# Altium PCB Main.PcbDoc (part 4 of 4)
Units mil, origin at the board's own origin, x right, y up, seen from the top; angles counter-clockwise.
Board outline 4000 x 4000 mil, 4 copper layers (L1-Top, L2-Ground, L3-Power, L4-Bottom), stack 63.556 mil thick; 424 components, 250 nets, 1628 pads, 3310 vias.
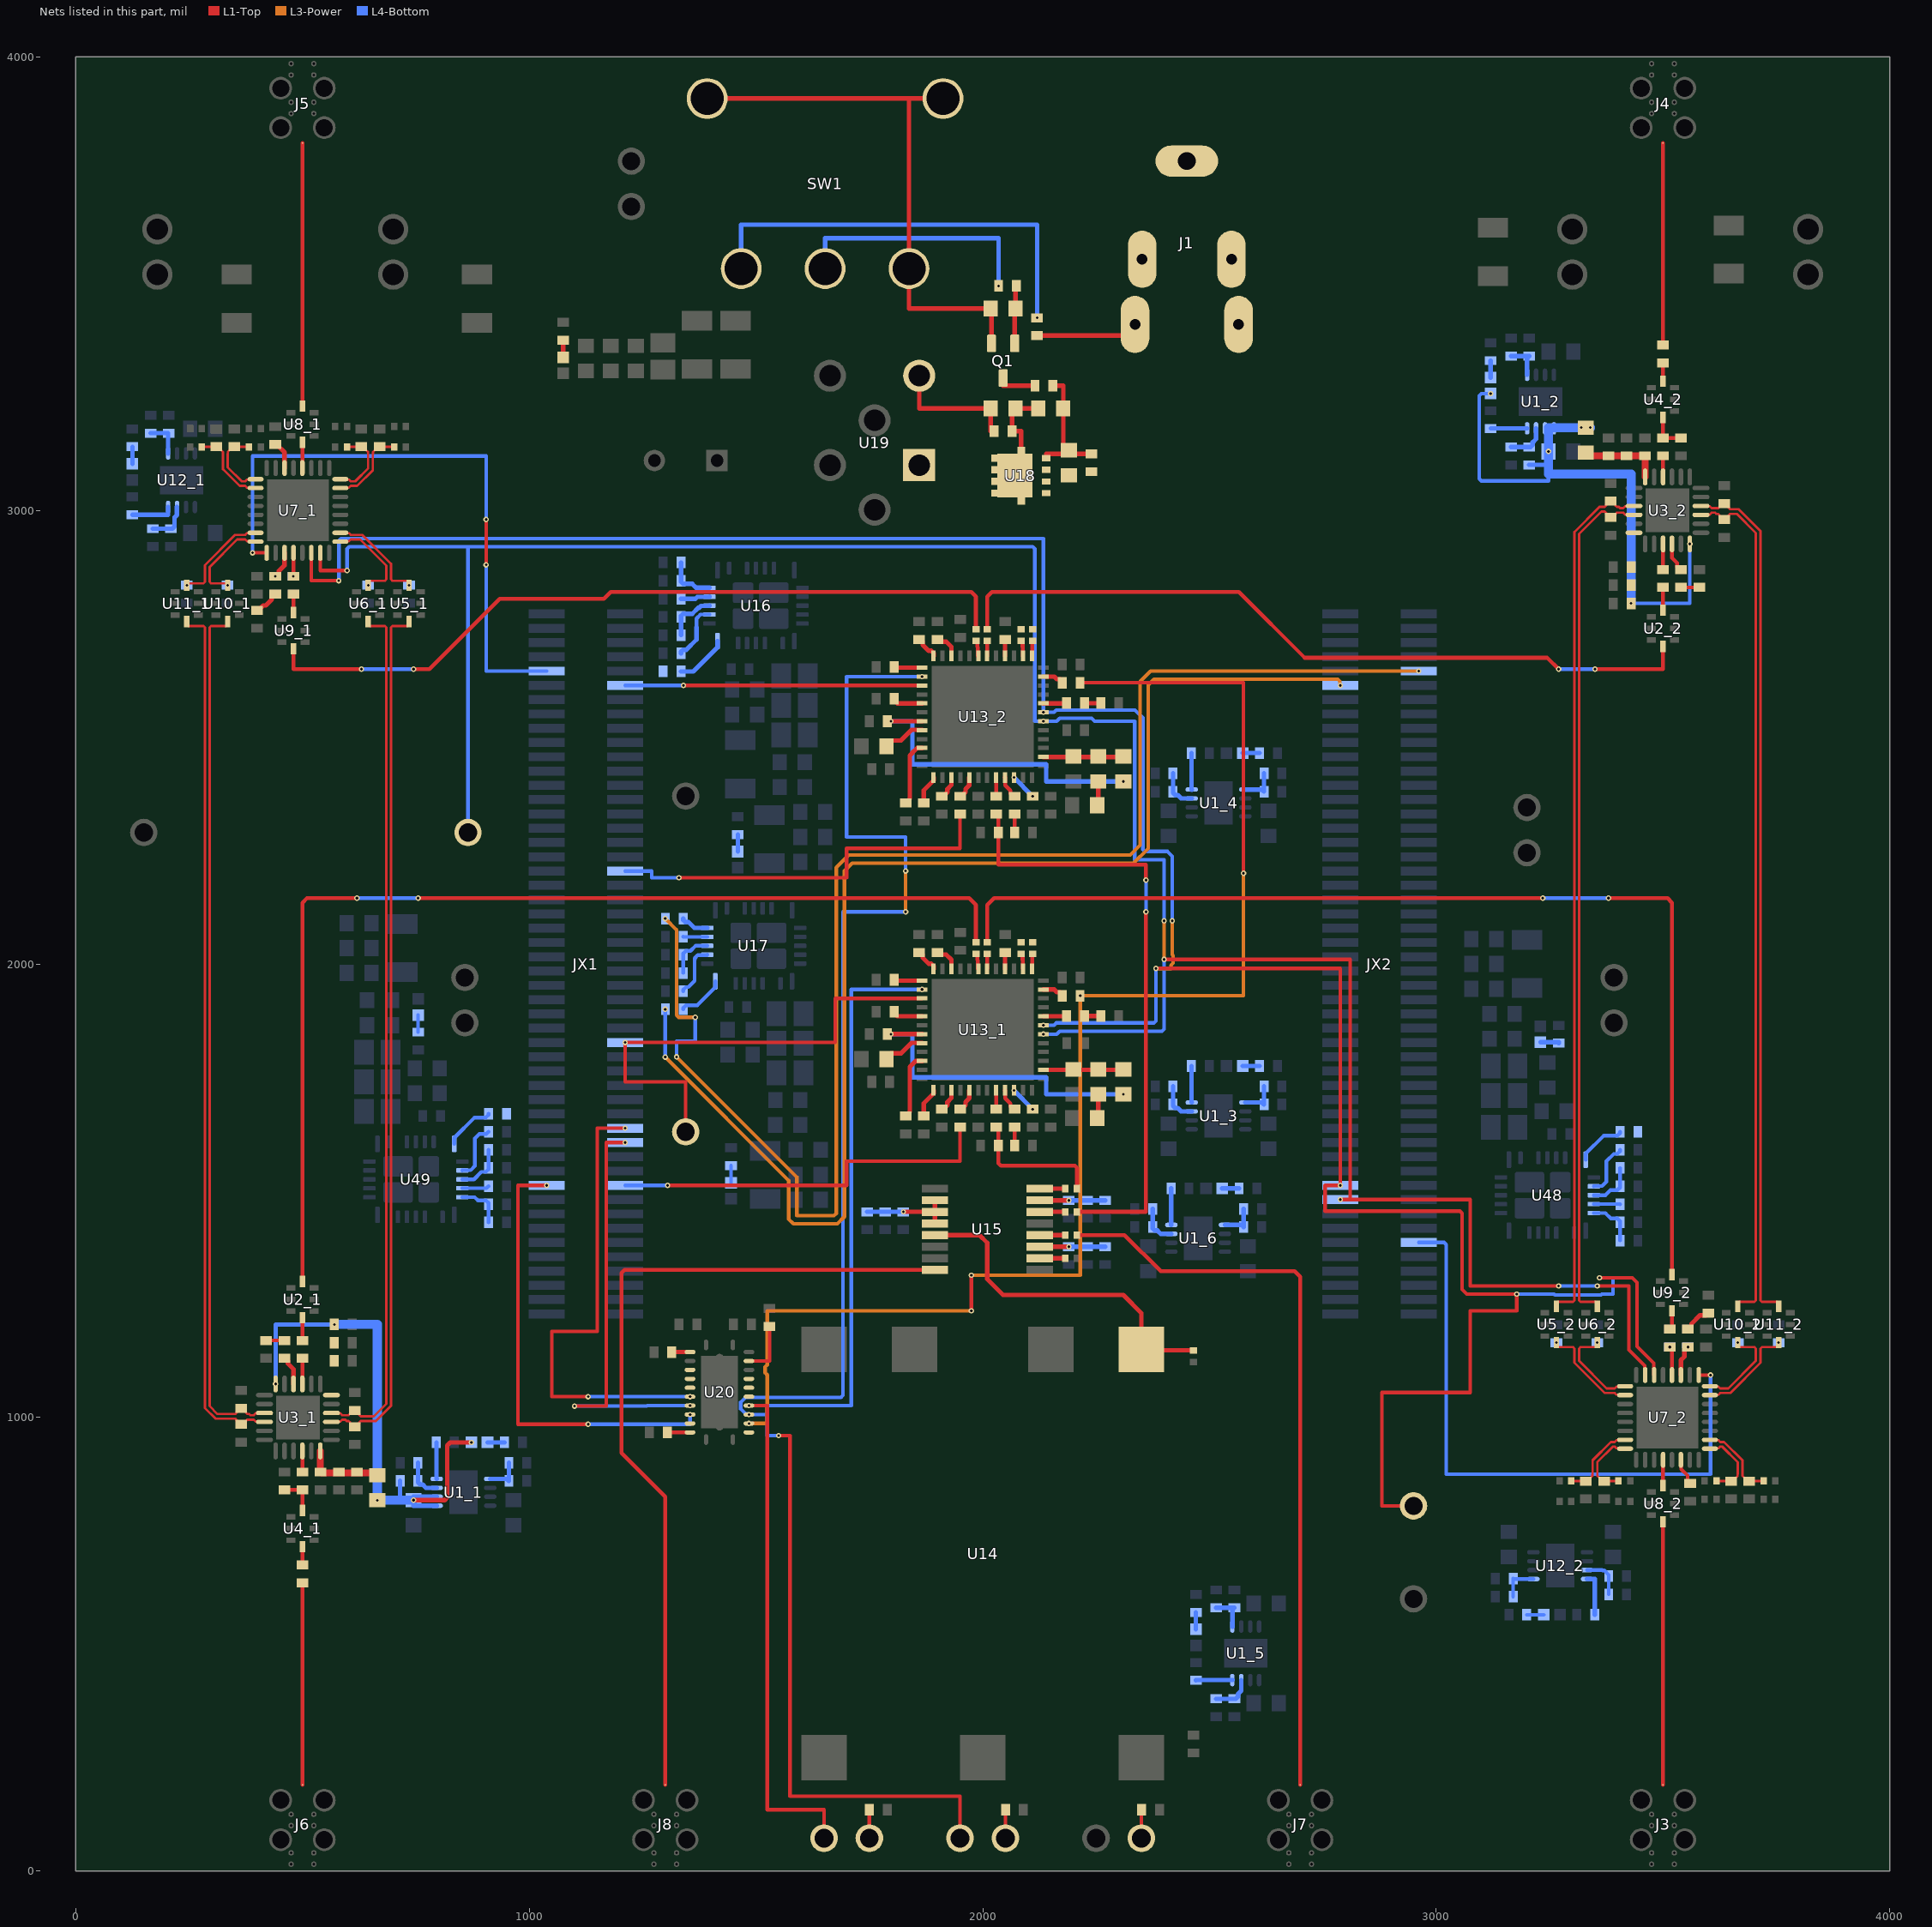
[diagram p6: the nets of this part, all layers, seen from the top]

## Via types
v1: diameter 12, hole 6, L1-Top to L2-Ground, tented top, 1761 vias
v2: diameter 12, hole 6, L1-Top to L4-Bottom, tented both sides, 971 vias
v3: diameter 12, hole 6, L3-Power to L4-Bottom, tented bottom, 308 vias
v4: diameter 12, hole 6, L3-Power to L4-Bottom, tented both sides, 148 vias
v5: diameter 22, hole 10, L1-Top to L4-Bottom, tented top, 48 vias
v6: diameter 22, hole 10, L1-Top to L4-Bottom, 36 vias
v7: diameter 12, hole 6, L1-Top to L2-Ground, tented both sides, 20 vias
v8: diameter 160, hole 120, L1-Top to L4-Bottom, 8 vias
v9: diameter 22, hole 10, L1-Top to L4-Bottom, tented both sides, 4 vias
v10: diameter 80, hole 66.93, L1-Top to L4-Bottom, tented both sides, 2 vias
v11: diameter 40, hole 31.5, L1-Top to L4-Bottom, 2 vias
v12: diameter 60, hole 47.24, L1-Top to L4-Bottom, 2 vias

## Nets (pads, with @x,y where several pads share a name; then routed paths per layer and width w, separated by ;. In a path a pad name is that pad's centre, name@x,y a point inside that pad or via, vN(x,y) a via of type N, cw(c..) or ccw(c..) an arc to the next point about the centre after c; other vN are vias at no path point) (continued)
GND_IN: C96.1 C104.1 J1.3 J1.4 J1.S1 Q1.S R48.1 SW1.3 SW1.4 SW1.5 U19.2 | length 1529
  L1-Top w10: SW1.4@1392.5,3908.15 1837.5,3908.15 ; U19.2@1860,3296.85 1860,3225 C96.1@2017.44,3225 2017.44,3175 R48.1@2025.32,3175 ; SW1.5@1912.5,3908.15 1837.5,3908.15 ; Q1.S@2019.41,3368.19 2019.41,3445 C104.1@2017.44,3445 1837.5,3445 SW1.3@1837.5,3533.15 1837.5,3908.15
IF_1: C10_1.2 U3_1.16 | length 46.6
  L1-Top w8.8: U3_1.16@499.84,926.18 499.84,879.84 C10_1.2@500,879.68
IF_2: C10_2.2 U3_2.16 | length 46.7
  L1-Top w8.8: C10_2.2@3500,3120.31 3500,3073.82 U3_2.16@3500.16,3073.82
IFIN_1: U7_1.4 U8_1.4 | length 56.7
  L1-Top w8.8: U7_1.4@499.84,3093.5 499.84,3150 U8_1.4@500,3150
IFIN_2: U7_2.4 U8_2.4 | length 56.6
  L1-Top w8.8: U8_2.4@3500,850 3500.08,850.08 3500.08,906.42 U7_2.4@3500.16,906.5
LMX_A_LD_1V8: JX1.74 U20.7 | length 1058.1
  L1-Top w8: v2(1130,1045.83) 1050,1045.83 1050,1190 1150,1190 1150,1637.8 v2(1211.61,1637.8)
  L4-Bottom w8: v2(1130,1045.83) v2(1354.57,1045.83)
LMX_A_LD_3V3: D8.2 U13_1.38 U20.17 | length 2418.3
  L1-Top w8: v2(1484.49,1026.14) 1525,1026.14 1525,135 1650,135 D8.2@1650,72.44
  L4-Bottom w8: v2(1484.49,1026.14) 1710,1026.14 1710,1943.58 v2(1866.14,1943.58)
LMX_A_PSYNC_1V8: JX1.82 R21_1.1 | length 866.9
  L1-Top w8: v2(1305,1511.81) 1700,1511.81 1700,1565 1950,1565 R21_1.1@1950,1640.32
  L4-Bottom w8: JX1.82@1211.61,1511.81 v2(1305,1511.81)
LMX_B_LD_1V8: JX1.76 U20.8 | length 948
  L1-Top w8: v2(1100,1025) 1170,1025 1170,1606.3 v2(1211.61,1606.3)
  L4-Bottom w8: v2(1100,1025) 1258.86,1025 1260,1026.14 v2(1354.57,1026.14)
LMX_B_LD_3V3: D7.2 U13_2.38 U20.16 | length 3688.2
  L1-Top w8: v2(1550,960) 1575,960 1575,165 1950,165 D7.2@1950,72.44
  L3-Power w8: v2(1830,2115) v2(1830,2205)
  L4-Bottom w8: v2(1550,960) 1525,960 1525,1006.46 v2(1484.49,1006.46) 1483.72,1007.22 1480.89,1007.22 1479.98,1008.14 1477.03,1008.14 1466.49,1018.69 1466.49,1033.6 1477.03,1044.14 1687.31,1044.14 1692,1048.83 1692,2115 v2(1830,2115) ; v2(1830,2205) 1830,2280 1700,2280 1700,2633.58 v2(1866.14,2633.58)
LMX_B_PSYNC_1V8: JX1.38 R21_2.1 | length 893.4
  L1-Top w8: v2(1330,2190) 1700,2190 1700,2255 1950,2255 R21_2.1@1950,2330.32
  L4-Bottom w8: JX1.38@1211.61,2204.72 1270,2204.72 1270,2190 v2(1330,2190)
LO_1_N: C8_1.1 U3_1.4 | length 66.6
  L1-Top w10: C8_1.1@460,1130.32 462.95,1130.32 467.8,1125.47 467.8,1118.67 480.16,1106.31 U3_1.4@480.16,1073.82
LO_1_P: C7_1.1 U3_1.3 | length 56.6
  L1-Top w8.8: U3_1.3@499.84,1073.82 499.84,1130.16 C7_1.1@500,1130.32
LO_2_N: C8_2.1 U3_2.4 | length 66.6
  L1-Top w8: U3_2.4@3519.84,2926.18 3519.84,2895.48 3531.2,2884.12 3531.2,2875.53 3537.05,2869.68 C8_2.1@3540,2869.68
LO_2_P: C7_2.1 U3_2.3 | length 56.7
  L1-Top w8.8: C7_2.1@3500,2869.68 3500,2926.18 U3_2.3@3500.16,2926.18
LO_A_N: C43_1.2 U9_2.8 | length 2422.4
  L1-Top w8.8: C43_1.2@2010,2047.99 2010,2130 2025,2145 v2(3235,2145) ; v2(3380,2145) 3510,2145 3520,2135 U9_2.8@3520,1315
  L4-Bottom w8: v2(3235,2145) v2(3380,2145)
LO_A_P: C44_1.2 U2_1.8 | length 2412.4
  L1-Top w8.8: U2_1.8@500,1300 500,2135 510,2145 v2(620,2145) ; v2(755,2145) 1970,2145 1985,2130 C44_1.2@1985,2047.99
  L4-Bottom w8: v2(620,2145) v2(755,2145)
LO_B_N: C43_2.2 U2_2.8 | length 1686.6
  L1-Top w8.8: C43_2.2@2010,2737.99 2010,2810 2020,2820 2565,2820 2710,2675 3245,2675 v2(3270,2650) ; v2(3350,2650) 3500,2650 U2_2.8@3500,2700
  L4-Bottom w8.8: v2(3270,2650) v2(3350,2650)
LO_B_P: C44_2.2 U9_1.8 | length 1696.6
  L1-Top w8.8: U9_1.8@480,2695 480,2650 v2(630,2650) ; v2(745,2650) 780,2650 935,2805 1165,2805 1180,2820 1975,2820 1985,2810 C44_2.2@1985,2737.99
  L4-Bottom w8: v2(630,2650) v2(745,2650)
LOM_1: C19_1.1 C20_1.2 U7_1.20 | length 51.9
  L1-Top w8.8: v2(480,2854.68) 480.16,2854.84 U7_1.20@480.16,2906.5
LOM_2: C19_2.1 C20_2.2 U7_2.20 | length 63.8
  L1-Top w8.8: v2(3515,1155.32) 3519.84,1150.47 U7_2.20@3519.84,1093.5
MI_1_N: C18_1.1 L2_1.1 U7_1.31 | length 179.8
  L1-Top w5.24: U7_1.31@583.5,3049.21 584.38,3050.09 602.3,3050.09 606.14,3053.93 620.63,3053.93 655.12,3088.42 655.12,3124.95 655.42,3125.24 655.42,3128.69 667.05,3140.31 L2_1.1@670,3140.31 670.32,3140 C18_1.1@702.01,3140
MI_1_P: C17_1.2 L1_1.1 U7_1.32 | length 162.8
  L1-Top w5.24: U7_1.32@583.5,3068.9 584.38,3068.02 602.3,3068.02 606.14,3064.18 616.39,3064.18 644.88,3092.67 644.88,3124.95 644.58,3125.24 644.58,3128.69 632.95,3140.31 L1_1.1@630,3140.31 629.68,3140 C17_1.2@597.99,3140
MI_2_N: C18_2.1 L2_2.1 U7_2.31 | length 176.3
  L1-Top w5.24: C18_2.1@3297.99,860 3329.69,860 L2_2.1@3330,859.68 3332.95,859.68 3344.58,871.31 3344.58,874.76 3344.88,875.05 3344.88,905.68 3385.27,946.07 3393.86,946.07 3397.7,949.91 3415.62,949.91 U7_2.31@3416.5,950.79
MI_2_P: C17_2.2 L1_2.1 U7_2.32 | length 159.4
  L1-Top w5.24: C17_2.2@3402.01,860 3401.69,859.68 L1_2.1@3370,859.68 3367.05,859.68 3355.42,871.31 3355.42,874.76 3355.12,875.05 3355.12,901.43 3389.51,935.82 3393.86,935.82 3397.7,931.98 3415.62,931.98 U7_2.32@3416.5,931.1
MQ_1_N: C25_1.1 L4_1.2 U7_1.10 | length 178.4
  L1-Top w5.24: C25_1.1@277.99,3140 309.68,3140 L4_1.2@310,3140.31 312.95,3140.31 324.58,3128.69 324.58,3125.24 324.88,3124.95 324.88,3090.76 361.7,3053.93 373.86,3053.93 377.7,3050.09 395.62,3050.09 U7_1.10@396.5,3049.21
MQ_1_P: C24_1.2 L3_1.2 U7_1.9 | length 161.4
  L1-Top w5.24: C24_1.2@382.01,3140 381.69,3140.31 L3_1.2@350,3140.31 347.05,3140.31 335.42,3128.69 335.42,3125.24 335.12,3124.95 335.12,3095 365.94,3064.18 373.86,3064.18 377.7,3068.02 395.62,3068.02 U7_1.9@396.5,3068.9
MQ_2_N: C25_2.1 L4_2.2 U7_2.10 | length 176.3
  L1-Top w5.24: U7_2.10@3603.5,950.79 3604.38,949.91 3622.3,949.91 3626.14,946.07 3634.73,946.07 3675.12,905.68 3675.12,875.05 3675.42,874.76 3675.42,871.31 3687.05,859.68 L4_2.2@3690,859.68 3690.31,860 C25_2.1@3722.01,860
MQ_2_P: C24_2.2 L3_2.2 U7_2.9 | length 159.4
  L1-Top w5.24: U7_2.9@3603.5,931.1 3604.38,931.98 3622.3,931.98 3626.14,935.82 3630.49,935.82 3664.88,901.43 3664.88,875.05 3664.58,874.76 3664.58,871.31 3652.95,859.68 L3_2.2@3650,859.68 3649.69,860 C24_2.2@3617.99,860
NetC3_1_2: C3_1.2 U1_1.4 | length 81.1
  L4-Bottom w10: C3_1.2@795.32,945 795.32,864.53 U1_1.4@795.94,864.53
NetC3_2_2: C3_2.2 U1_2.4 | length 79.6
  L4-Bottom w10: C3_2.2@3120.84,3180.94 U1_2.4@3200.47,3180.94
NetC3_3_2: C3_3.2 U1_3.4 | length 81.1
  L4-Bottom w10: C3_3.2@2460.32,1775 2460.32,1694.53 U1_3.4@2460.94,1694.53
NetC3_4_2: C3_4.2 U1_4.4 | length 81.1
  L4-Bottom w10: C3_4.2@2460.32,2465 2460.32,2384.53 U1_4.4@2460.94,2384.53
NetC3_5_2: C3_5.2 U1_5.4 | length 81.1
  L4-Bottom w10: C3_5.2@2470,420.32 2470,420.94 U1_5.4@2550.47,420.94
NetC3_6_2: C3_6.2 U1_6.4 | length 81.1
  L4-Bottom w10: C3_6.2@2415.32,1505 2415.32,1424.53 U1_6.4@2415.94,1424.53
NetC7_1_2: C7_1.2 U2_1.4 | length 50.3
  L1-Top w8.8: C7_1.2@500,1169.68 U2_1.4@500,1220
NetC7_2_2: C7_2.2 U2_2.4 | length 50.3
  L1-Top w8.8: U2_2.4@3500,2780 C7_2.2@3500,2830.32
NetC8_1_2: C8_1.2 R6_1.2 | length 40
  L1-Top w8: R6_1.2@420,1169.68 C8_1.2@460,1169.68
NetC8_2_2: C8_2.2 R6_2.2 | length 40
  L1-Top w8: C8_2.2@3540,2830.32 R6_2.2@3580,2830.32
NetC9_1_1: C9_1.1 U4_1.4 | length 40.3
  L1-Top w8.8: C9_1.1@500,674.68 U4_1.4@500,715
NetC9_1_2: C9_1.2 J6.S | length 445.3
  L1-Top w8.8: J6.S@500,190 C9_1.2@500,635.32
NetC9_2_1: C9_2.1 U4_2.4 | length 40.3
  L1-Top w8.8: U4_2.4@3500,3285 C9_2.1@3500,3325.31
NetC9_2_2: C9_2.2 J4.S | length 445.3
  L1-Top w8.8: C9_2.2@3500,3364.69 J4.S@3500,3810
NetC10_1_1: C10_1.1 C11_1.1 U4_1.8 | length 85.3
  L1-Top w8.8: C11_1.1@460,840.32 C10_1.1@500,840.32 U4_1.8@500,795
NetC10_2_1: C10_2.1 C11_2.1 U4_2.8 | length 85.3
  L1-Top w8.8: U4_2.8@3500,3205 C10_2.1@3500,3159.69 C11_2.1@3540,3159.69
NetC20_1_1: C20_1.1 U9_1.4 | length 40.3
  L1-Top w8.8: U9_1.4@480,2775 C20_1.1@480,2815.32
NetC20_2_1: C20_2.1 U9_2.4 | length 42.4
  L1-Top w8.8: C20_2.1@3515,1194.68 3520,1199.68 U9_2.4@3520,1235
NetC22_1_2: C22_1.2 R13_1.2 | length 58.7
  L1-Top w10: C22_1.2@400,2779.68 402.95,2779.68 413.74,2790.47 419.01,2790.47 432.2,2803.67 432.2,2810.47 437.05,2815.32 R13_1.2@440,2815.32
NetC22_2_2: C22_2.2 R13_2.2 | length 63.7
  L1-Top w10: R13_2.2@3555,1194.68 3557.95,1194.68 3562.8,1199.53 3562.8,1206.33 3581.94,1225.47 3595.16,1225.47 C22_2.2@3600,1230.32
NetC23_1_1: C23_1.1 R13_1.1 U7_1.19 | length 62
  L1-Top w10: v2(440,2854.68) 442.95,2854.68 447.8,2859.53 447.8,2866.33 460.47,2879.01 U7_1.19@460.47,2906.5
NetC23_2_1: C23_2.1 R13_2.1 U7_2.19 | length 69.9
  L1-Top w10: U7_2.19@3539.53,1093.5 3539.53,1126.22 3547.2,1133.9 3547.2,1150.47 3552.05,1155.32 v2(3555,1155.32)
NetC31_1_2: C31_1.2 U12_1.4 | length 96
  L4-Bottom w10: C31_1.2@125,2990.32 203.78,2990.32 U12_1.4@203.78,3007.55
NetC31_2_2: C31_2.2 U12_2.4 | length 96
  L4-Bottom w10: U12_2.4@3332.45,643.78 3349.69,643.78 C31_2.2@3349.69,565
NetC39_1_1: C39_1.1 U13_1.26 | length 34.6
  L1-Top w8.8: C39_1.1@2085,2022.01 2087.93,2019.08 2087.93,2009.12 2088.58,2008.47 U13_1.26@2088.58,1988.86
NetC39_1_2: C39_1.2
NetC39_2_1: C39_2.1 U13_2.26 | length 34.6
  L1-Top w8.8: C39_2.1@2085,2712.01 2087.93,2709.08 2087.93,2699.12 2088.58,2698.47 U13_2.26@2088.58,2678.86
NetC39_2_2: C39_2.2
NetC40_1_1: C40_1.1 U13_1.25 | length 33.9
  L1-Top w8.8: U13_1.25@2108.27,1988.86 2108.99,1989.58 2108.99,2021 C40_1.1@2110,2022.01
NetC40_1_2: C40_1.2
NetC40_2_1: C40_2.1 U13_2.25 | length 33.9
  L1-Top w8.8: U13_2.25@2108.27,2678.86 2108.99,2679.58 2108.99,2711 C40_2.1@2110,2712.01
NetC40_2_2: C40_2.2
NetC43_1_1: C43_1.1 U13_1.30 | length 33.2
  L1-Top w8.8: U13_1.30@2009.84,1988.86 2009.92,1988.94 2009.92,2021.93 C43_1.1@2010,2022.01
NetC43_2_1: C43_2.1 U13_2.30 | length 33.2
  L1-Top w8.8: U13_2.30@2009.84,2678.86 2009.92,2678.94 2009.92,2711.93 C43_2.1@2010,2712.01
NetC44_1_1: C44_1.1 U13_1.31 | length 35.3
  L1-Top w8.8: C44_1.1@1985,2022.01 1987.93,2019.08 1987.93,2009.12 1989.43,2007.62 1989.43,1989.58 U13_1.31@1990.16,1988.86
NetC44_2_1: C44_2.1 U13_2.31 | length 35.3
  L1-Top w8.8: C44_2.1@1985,2712.01 1987.93,2709.08 1987.93,2699.12 1989.43,2697.62 1989.43,2679.58 U13_2.31@1990.16,2678.86
NetC47_1_2: C47_1.2 U13_1.10 | length 58.5
  L4-Bottom w10: v2(2068.9,1721.14) 2068.9,1720.96 2110,1679.86 v2(2110,1679.68)
NetC47_2_2: C47_2.2 U13_2.10 | length 58.5
  L4-Bottom w10: v2(2068.9,2411.14) 2068.9,2410.96 2110,2369.86 v2(2110,2369.68)
NetC48_1_2: C48_1.2 U13_1.46 | length 146.1
  L1-Top w10: C48_1.2@1830,1664.68 1832.95,1664.68 1837.8,1669.53 1837.8,1672.48 1839.33,1674.02 1839.33,1772.9 1852.54,1786.1 U13_1.46@1866.14,1786.1
NetC48_2_2: C48_2.2 U13_2.46 | length 144.6
  L1-Top w10: C48_2.2@1830,2354.68 1832.95,2354.68 1837.8,2359.53 1837.8,2362.48 1839.33,2364.02 1839.33,2459.33 1844.33,2464.33 1844.33,2465.28 1855.15,2476.1 U13_2.46@1866.14,2476.1
NetC49_1_2: C49_1.2 U13_1.36 | length 54.6
  L1-Top w10: C49_1.2@1860,2025.32 1862.95,2025.32 1867.8,2020.47 1867.8,2013.67 1880.99,2000.47 1886.65,2000.47 1891.73,1995.39 U13_1.36@1891.73,1988.86
NetC49_2_2: C49_2.2 U13_2.36 | length 54.6
  L1-Top w10: C49_2.2@1860,2715.32 1862.95,2715.32 1867.8,2710.47 1867.8,2703.67 1880.99,2690.47 1886.65,2690.47 1891.73,2685.39 U13_2.36@1891.73,2678.86
NetC50_1_2: C50_1.2 U13_1.34 | length 57.9
  L1-Top w10: C50_1.2@1900,2025.32 1904.58,2020.73 1919.27,2020.73 1930.79,2009.21 1930.79,1995.71 1931.1,1995.39 U13_1.34@1931.1,1988.86
NetC50_2_2: C50_2.2 U13_2.34 | length 57.9
  L1-Top w10: C50_2.2@1900,2715.32 1904.58,2710.73 1919.27,2710.73 1930.79,2699.21 1930.79,2685.71 1931.1,2685.39 U13_2.34@1931.1,2678.86
NetC51_1_2: C51_1.2 U13_1.41 | length 67.5
  L1-Top w10: C51_1.2@1804.68,1895 1804.68,1892.05 1812.2,1884.53 U13_1.41@1866.14,1884.53
NetC51_2_2: C51_2.2 U13_2.41 | length 67.5
  L1-Top w10: C51_2.2@1804.68,2585 1804.68,2582.05 1812.2,2574.53 U13_2.41@1866.14,2574.53
NetC52_1_2: C52_1.2 U13_1.44 | length 95.3
  L1-Top w10: C52_1.2@1787.56,1790 1787.56,1791.97 1798.31,1802.72 1819.65,1802.72 1843.04,1826.1 1866.14,1826.1 U13_1.44@1866.14,1825.47
NetC52_2_2: C52_2.2 U13_2.44 | length 95.3
  L1-Top w10: C52_2.2@1787.56,2480 1787.56,2481.97 1798.31,2492.72 1819.65,2492.72 1843.04,2516.1 1866.14,2516.1 U13_2.44@1866.14,2515.47
NetC53_1_2: C53_1.2 U13_1.3 | length 51.9
  L1-Top w10: C53_1.2@1910,1679.68 1912.95,1679.68 1922.2,1688.94 1922.2,1695.74 1931.1,1704.64 U13_1.3@1931.1,1721.14
NetC53_2_2: C53_2.2 U13_2.3 | length 51.9
  L1-Top w10: C53_2.2@1910,2369.68 1912.95,2369.68 1922.2,2378.94 1922.2,2385.74 1931.1,2394.64 U13_2.3@1931.1,2411.14
NetC54_1_2: C54_1.2 C55_1.2 R24_1.1 U13_1.14 | length 176.6
  L1-Top w10: U13_1.14@2133.86,1766.42 2308.86,1766.42 R24_1.1@2310,1767.56
NetC54_2_2: C54_2.2 C55_2.2 R24_2.1 U13_2.14 | length 176.6
  L1-Top w10: U13_2.14@2133.86,2456.42 2308.86,2456.42 R24_2.1@2310,2457.56
NetC55_1_1: C55_1.1 R27_1.2 | length 53.5
  L1-Top w10: R27_1.2@2252.56,1660 2255,1662.44 C55_1.1@2255,1712.44
NetC55_2_1: C55_2.1 R27_2.2 | length 53.5
  L1-Top w10: R27_2.2@2252.56,2350 2255,2352.44 C55_2.1@2255,2402.44
NetC56_1_2: C56_1.2 R24_1.2 U13_1.43 | length 713.7
  L1-Top w10: v2(1797.56,1845.16) U13_1.43@1866.14,1845.16
  L4-Bottom w10: v2(1797.56,1845.16) 1845,1845.16 1845,1750 2140,1750 2140,1712.44 v2(2310,1712.44)
NetC56_2_2: C56_2.2 R24_2.2 U13_2.43 | length 713.7
  L1-Top w10: v2(1797.56,2535.16) U13_2.43@1866.14,2535.16
  L4-Bottom w10: v2(1797.56,2535.16) 1845,2535.16 1845,2440 2140,2440 2140,2402.44 v2(2310,2402.44)
NetC57_1_1: C57_1.1 U13_1.20 | length 51.5
  L1-Top w10: U13_1.20@2133.86,1884.53 2184.81,1884.53 C57_1.1@2185.21,1884.92
NetC57_1_2: C57_1.2 R26_1.1 | length 35.8
  L1-Top w10: C57_1.2@2224.58,1884.92 2224.62,1884.96 R26_1.1@2260.32,1885 R26_1.1@2260.32,1885
NetC57_2_1: C57_2.1 U13_2.20 | length 51.5
  L1-Top w10: U13_2.20@2133.86,2574.53 2184.81,2574.53 C57_2.1@2185.21,2574.92
NetC57_2_2: C57_2.2 R26_2.1 | length 35.8
  L1-Top w10: C57_2.2@2224.58,2574.92 2224.62,2574.96 R26_2.1@2260.32,2575 R26_2.1@2260.32,2575
NetC58_1_1: C58_1.1 U13_1.8 | length 41.7
  L1-Top w8.8: U13_1.8@2029.53,1721.14 2029.53,1680.16 C58_1.1@2030,1679.68
NetC58_1_2: C58_1.2 R28_1.2 R30.2 | length 305.1
  L1-Top w8.8: C58_1.2@2030,1640.32 2034.68,1635.63 2034.68,1560.32 2040,1555 2203.31,1555 2207.99,1550.31 R30.2@2207.99,1504.57
NetC58_2_1: C58_2.1 U13_2.8 | length 41.7
  L1-Top w8.8: U13_2.8@2029.53,2411.14 2029.53,2370.16 C58_2.1@2030,2369.68
NetC58_2_2: C58_2.2 R28_2.2 R31.2 | length 1356.2
  L1-Top w8.8: C58_2.2@2030,2330.32 2034.68,2325.63 R28_2.2@2034.68,2290 2034.68,2218.61 2360,2218.61 v2(2360,2185) ; R31.2@2207.99,1453.39 2360,1453.39 v2(2360,2115)
  L4-Bottom w8: v2(2360,2115) v2(2360,2185)
NetC59_1_1: C59_1.1 U13_1.28 | length 36.8
  L1-Top w10: U13_1.28@2049.21,1988.86 2049.21,2024.53 C59_1.1@2050,2025.32
NetC59_2_1: C59_2.1 U13_2.28 | length 36.8
  L1-Top w10: U13_2.28@2049.21,2678.86 2049.21,2714.53 C59_2.1@2050,2715.32
NetC60_1_1: C60_1.1 U13_1.9 | length 51.8
  L1-Top w8.8: U13_1.9@2049.21,1721.14 2049.94,1720.42 2049.94,1703.77 2061.2,1692.5 2061.2,1685.53 2067.05,1679.68 C60_1.1@2070,1679.68
NetC60_1_2: C60_1.2 R29_1.1 | length 40.6
  L1-Top w8: C60_1.2@2070,1640.32 2070.32,1640.32 R29_1.1@2070.32,1600
NetC60_2_1: C60_2.1 U13_2.9 | length 51.8
  L1-Top w8.8: U13_2.9@2049.21,2411.14 2049.94,2410.42 2049.94,2393.77 2061.2,2382.5 2061.2,2375.53 2067.05,2369.68 C60_2.1@2070,2369.68
NetC60_2_2: C60_2.2 R29_2.1 | length 40.6
  L1-Top w8: C60_2.2@2070,2330.32 2070.32,2330.32 R29_2.1@2070.32,2290
NetC61_1: C61.1 C62.1 FB2.2 U15.2 U15.3 U15.4 | length 200.5
  L1-Top w10: v2(1825,1453.39) U15.3@1894.33,1453.39 ; U15.4@1894.33,1427.8 U15.2@1894.33,1478.98
  L4-Bottom w10: FB2.2@1745,1453.39 v2(1825,1453.39)
NetC63_1: C63.1 C64.1 FB3.2 U15.11 | length 144.3
  L1-Top w10: U15.11@2125.67,1376.61 v2(2190,1376.61)
  L4-Bottom w10: v2(2190,1376.61) FB3.2@2270,1376.61
NetC66_2: C66.2 U14.4 U15.5 | length 769.7
  L1-Top w10: U15.5@1894.33,1402.2 1992.8,1402.2 2010,1385 2010,1305 2045,1270 2310,1270 2350,1230 U14.4@2350,1150 2352.01,1147.99 C66.2@2465,1147.99
NetC67_1: C67.1 C68.1 FB4.2 U15.15 | length 144.5
  L1-Top w10: U15.15@2125.67,1478.98 2125.83,1478.82 2189.84,1478.82 v2(2190,1478.66)
  L4-Bottom w10: v2(2190,1478.66) FB4.2@2270,1478.66
NetC81_2: C81.2 U16.21 | length 127.1
  L4-Bottom w8: 1368.86,2741.54 1368.86,2761.56 1377.61,2770.31 U16.21@1397.64,2770.31
  L4-Bottom w10: C81.2@1334.68,2685 1334.68,2687.95 1339.53,2692.8 1346.33,2692.8 1368.86,2715.32 1368.86,2741.54
NetC93_2: C93.2 U17.21 | length 117.1
  L4-Bottom w8: C93.2@1339.68,1940 1339.68,1942.95 1345.53,1948.8 1350.92,1948.8 1364.86,1962.74 1364.86,1990.79 1364.86,2010.2 1365,2010.34 1365,2012.69 1371.87,2019.55 1391.87,2019.55 U17.21@1392.64,2020.31
NetC94_1: C94.1 C95.1 R47.1 R51.2 U18.4 | length 287.4
  L1-Top w10: U18.4@2140,3115 2140,3124.69 R47.1@2240,3124.69 ; R51.2@2154.68,3275 2177.56,3275 C95.1@2177.56,3225 2177.56,3132.56 C94.1@2190,3132.56
NetC104_2: C104.2 Q1.G R52.2 | length 130.6
  L1-Top w10: Q1.G@2070.59,3368.19 2070.59,3445 C104.2@2072.56,3445 2072.56,3495 R52.2@2074.37,3495
NetC234_2: C234.2 U48.21 | length 119.3
  L4-Bottom w8: U48.21@3347.36,1509.69 3348.13,1510.45 3365.79,1510.45 3375.14,1519.8 3375.14,1564.86 3391.49,1581.2 3399.47,1581.2 3405.31,1587.05 C234.2@3405.31,1590
NetC244_2: C244.2 U49.21 | length 128.6
  L4-Bottom w8: U49.21@852.36,1544.69 853.13,1545.45 870.79,1545.45 880.14,1554.8 880.14,1615.14 890,1625 905.32,1625 C244.2@910.32,1630
NetD1_1_2: D1_1.2 R3_1.2 | length 37.3
  L4-Bottom w10: D1_1.2@908.03,945 R3_1.2@945.32,945
NetD1_2_2: D1_2.2 R3_2.2 | length 37.3
  L4-Bottom w10: D1_2.2@3120,3293.03 R3_2.2@3120,3330.31
NetD1_3_2: D1_3.2 R3_3.2 | length 37.3
  L4-Bottom w10: D1_3.2@2573.03,1775 R3_3.2@2610.32,1775
NetD1_4_2: D1_4.2 R3_4.2 | length 37.3
  L4-Bottom w10: D1_4.2@2573.03,2465 R3_4.2@2610.32,2465
NetD1_5_2: D1_5.2 R3_5.2 | length 37.3
  L4-Bottom w10: D1_5.2@2470,533.03 R3_5.2@2470,570.32
NetD1_6_2: D1_6.2 R3_6.2 | length 37.3
  L4-Bottom w10: D1_6.2@2528.03,1505 R3_6.2@2565.32,1505
NetD2_1_2: D2_1.2 R18_1.2 | length 37.6
  L4-Bottom w10: D2_1.2@125,3102.72 R18_1.2@125,3140.31
NetD2_2_2: D2_2.2 R18_2.2 | length 37.6
  L4-Bottom w8: R18_2.2@3199.69,565 D2_2.2@3237.28,565
NetD3_2: D3.2 R39.2 | length 37.6
  L4-Bottom w10: D3.2@1460,2247.72 R39.2@1460,2285.32
NetD4_2: D4.2 R45.2 | length 37.6
  L4-Bottom w8: D4.2@1445,1517.72 R45.2@1445,1555.32
NetD5_2: D5.2 R50.2 | length 37.6
  L1-Top w10: D5.2@1075,3337.72 R50.2@1075,3375.31
NetD6_1: D6.1 R60.2 | length 62.9
  L1-Top w8: D6.1@2350,72.44 2350,135 R60.2@2350.32,135
NetD7_1: D7.1 R61.2 | length 62.9
  L1-Top w8: D7.1@2050,72.44 2050,135 R61.2@2050.32,135
NetD8_1: D8.1 R62.2 | length 62.9
  L1-Top w8: D8.1@1750,72.44 1750,135 R62.2@1750.32,135
NetD13_2: D13.2 R90.2 | length 42
  L4-Bottom w10: D13.2@3230,1827.28 3270,1827.28 R90.2@3270,1825.32
NetD18_2: D18.2 R97.2 | length 37.6
  L4-Bottom w8: R97.2@755,1849.68 D18.2@755,1887.28
NetJ3_S: J3.S U8_2.8 | length 580
  L1-Top w8.8: J3.S@3500,190 U8_2.8@3500,770
NetJ5_S: J5.S U8_1.8 | length 580
  L1-Top w8.8: U8_1.8@500,3230 J5.S@500,3810
NetJ7_S: J7.S R32.2 | length 1650.2
  L1-Top w8.8: R32.2@2207.99,1402.2 2312.8,1402.2 2392.5,1322.5 2687.5,1322.5 2700,1310 J7.S@2700,190
NetJ8_S: J8.S U15.8 | length 1862.1
  L1-Top w8.8: J8.S@1300,190 1300,825 1203.55,921.45 1203.55,1318.55 1210.43,1325.43 U15.8@1894.33,1325.43
NetJX2_10: JX2.10 R41.1 | length 3381.1
  L3-Power w8: v2(1300,2100) 1325,2075 1325,1886.95 1329.69,1882.27 v2(1366,1882.27) ; v2(1325,1795) 1590,1530 1590,1445 1672,1445 1677,1450 1677,2212.46 1704.54,2240 2325,2240 2347,2262 2347,2622.46 2370.21,2645.67 v2(2961.61,2645.67)
  L4-Bottom w8: v2(1325,1795) 1325,1830 1366,1830 v2(1366,1882.27)
NetJX2_11: JX2.11 R46.2 | length 2961.4
  L3-Power w8: v2(1300,1794.54) 1572,1522.54 1572,1437.54 1582.54,1427 1679.46,1427 1695,1442.54 1695,2205 1712,2222 2332.46,2222 2365,2254.54 2365,2615 2377.67,2627.67 2783.05,2627.67 2787.74,2622.98 2787.74,2614.82 v2(2788.39,2614.17)
  L4-Bottom w8: v2(1300,1794.54) v2(1300,1900)
NetQ1_D: Q1.D R51.1 | length 87.1
  L1-Top w10: Q1.D@2045,3291.81 2045,3275 R51.1@2115.32,3275
NetR1_1_1: R1_1.1 R4_1.2 U1_1.3 | length 86.3
  L4-Bottom w10: R1_1.1@754.68,857.05 759.53,852.2 765.03,852.2 772.39,844.84 U1_1.3@795.94,844.84 ; R1_1.1@754.68,860 R4_1.2@754.68,900
NetR1_2_1: R1_2.1 R4_2.2 U1_2.3 | length 86.3
  L4-Bottom w10: R4_2.2@3165,3139.69 R1_2.1@3205,3139.69 ; R1_2.1@3207.95,3139.69 3212.8,3144.53 3212.8,3150.03 3220.16,3157.39 U1_2.3@3220.16,3180.94
NetR1_3_1: R1_3.1 R4_3.2 U1_3.3 | length 86.3
  L4-Bottom w10: R1_3.1@2419.68,1687.05 2424.53,1682.2 2430.03,1682.2 2437.39,1674.84 U1_3.3@2460.94,1674.84 ; R1_3.1@2419.68,1690 R4_3.2@2419.68,1730
NetR1_4_1: R1_4.1 R4_4.2 U1_4.3 | length 86.3
  L4-Bottom w10: R1_4.1@2419.68,2377.05 2424.53,2372.2 2430.03,2372.2 2437.39,2364.84 U1_4.3@2460.94,2364.84 ; R1_4.1@2419.68,2380 R4_4.2@2419.68,2420
NetR1_5_1: R1_5.1 R4_5.2 U1_5.3 | length 86.3
  L4-Bottom w10: R4_5.2@2515,379.68 R1_5.1@2555,379.68 ; R1_5.1@2557.95,379.68 2562.8,384.53 2562.8,390.03 2570.16,397.39 U1_5.3@2570.16,420.94
NetR1_6_1: R1_6.1 R4_6.2 U1_6.3 | length 86.3
  L4-Bottom w10: R1_6.1@2374.68,1417.05 2379.53,1412.2 2385.03,1412.2 2392.39,1404.84 U1_6.3@2415.94,1404.84 ; R1_6.1@2374.68,1420 R4_6.2@2374.68,1460
NetR2_1_1: R2_1.1 R5_1.2 U1_1.5 | length 83.1
  L4-Bottom w10: U1_1.5@914.06,864.53 950.79,864.53 R2_1.1@955.32,860 R5_1.2@955.32,900
NetR2_2_1: R2_2.1 R5_2.2 U1_2.5 | length 83.1
  L4-Bottom w10: R5_2.2@3165,3340.31 R2_2.1@3205,3340.31 3200.47,3335.79 U1_2.5@3200.47,3299.06
NetR2_3_1: R2_3.1 R5_3.2 U1_3.5 | length 83.1
  L4-Bottom w10: U1_3.5@2579.06,1694.53 2615.79,1694.53 R2_3.1@2620.32,1690 R5_3.2@2620.32,1730
NetR2_4_1: R2_4.1 R5_4.2 U1_4.5 | length 83.1
  L4-Bottom w10: U1_4.5@2579.06,2384.53 2615.79,2384.53 R2_4.1@2620.32,2380 R5_4.2@2620.32,2420
NetR2_5_1: R2_5.1 R5_5.2 U1_5.5 | length 83.1
  L4-Bottom w10: R5_5.2@2515,580.32 R2_5.1@2555,580.32 2550.47,575.79 U1_5.5@2550.47,539.06
NetR2_6_1: R2_6.1 R5_6.2 U1_6.5 | length 83.1
  L4-Bottom w10: U1_6.5@2534.06,1424.53 2570.79,1424.53 R2_6.1@2575.32,1420 R5_6.2@2575.32,1460
NetR16_1_1: R16_1.1 R19_1.2 U12_1.3 | length 92.4
  L4-Bottom w10: R19_1.2@170,2959.68 R16_1.1@210,2959.68 ; R16_1.1@212.95,2959.68 217.8,2964.53 217.8,2984.53 223.15,2989.89 223.15,3007.55 U12_1.3@223.47,3007.55
NetR16_2_1: R16_2.1 R19_2.2 U12_2.3 | length 95.2
  L4-Bottom w8: U12_2.3@3332.45,663.47 3365.71,663.47 3366.48,662.69 3370.57,662.69 3380.31,652.95 R16_2.1@3380.31,650 R19_2.2@3380.31,610
NetR17_1_1: R17_1.1 R20_1.2 U12_1.5 | length 83.4
  L4-Bottom w10: R20_1.2@165,3170.31 203.78,3170.31 U12_1.5@203.78,3125.66
NetR17_2_1: R17_2.1 R20_2.2 U12_2.5 | length 84.7
  L4-Bottom w8: R20_2.2@3169.69,605 R17_2.1@3169.69,645 ; R17_2.1@3169.69,643.78 U12_2.5@3214.34,643.78
NetR21_1_2: R21_1.2 U13_1.5 | length 51.7
  L1-Top w10: R21_1.2@1950,1679.68 1952.95,1679.68 1962.2,1688.94 1962.2,1695.74 1970.47,1704.01 U13_1.5@1970.47,1721.14
NetR21_2_2: R21_2.2 U13_2.5 | length 51.7
  L1-Top w10: R21_2.2@1950,2369.68 1952.95,2369.68 1962.2,2378.94 1962.2,2385.74 1970.47,2394.01 U13_2.5@1970.47,2411.14
NetR22_1_1: R22_1.1 U13_1.37 | length 62.2
  L1-Top w10: R22_1.1@1804.68,1965 1806.42,1963.27 U13_1.37@1866.14,1963.27
NetR22_2_1: R22_2.1 U13_2.37 | length 62.2
  L1-Top w10: R22_2.1@1804.68,2655 1806.42,2653.27 U13_2.37@1866.14,2653.27
NetR23_1_1: R23_1.1 U13_1.23 | length 48.8
  L1-Top w10: U13_1.23@2133.86,1943.58 2157.88,1943.58 2163.67,1937.8 2170.47,1937.8 2175.32,1932.95 R23_1.1@2175.32,1930
NetR23_2_1: R23_2.1 U13_2.23 | length 48.8
  L1-Top w10: U13_2.23@2133.86,2633.58 2157.88,2633.58 2163.67,2627.8 2170.47,2627.8 2175.32,2622.95 R23_2.1@2175.32,2620
NetR25_1_1: R25_1.1 U13_1.1 | length 65.5
  L1-Top w10: R25_1.1@1870,1664.68 1870,1692.87 1891.73,1714.61 U13_1.1@1891.73,1721.14
NetR25_2_1: R25_2.1 U13_2.1 | length 65.5
  L1-Top w10: R25_2.1@1870,2354.68 1870,2382.87 1891.73,2404.61 U13_2.1@1891.73,2411.14
NetR30_1: R30.1 U15.16 | length 56.3
  L1-Top w10: U15.16@2125.67,1504.57 R30.1@2182.01,1504.57
NetR31_1: R31.1 U15.14 | length 56.3
  L1-Top w10: U15.14@2125.67,1453.39 R31.1@2182.01,1453.39
NetR32_1: R32.1 U15.12 | length 56.3
  L1-Top w10: U15.12@2125.67,1402.2 R32.1@2182.01,1402.2
NetR33_1: R33.1 U15.10 | length 56.3
  L1-Top w10: U15.10@2125.67,1351.02 R33.1@2182.01,1351.02
NetR34_1: R34.1 R35.2 U16.24 | length 108.5
  L4-Bottom w10: R34.1@1334.68,2842.8 1339.53,2837.95 1359.53,2837.95 1368.11,2829.37 U16.24@1397.64,2829.37 ; R34.1@1334.68,2845 R35.2@1334.68,2885
NetR36_1: R36.1 R38.2 U16.22 | length 112.8
  L4-Bottom w10: R38.2@1334.68,2725 R36.1@1334.68,2765 ; R36.1@1334.68,2767.19 1339.53,2772.03 1359.53,2772.03 1372.5,2785 1374.68,2785 1379.05,2789.37 1397.64,2789.37 U16.22@1397.64,2790
NetR37_2: R37.2 U16.23 | length 65.1
  L4-Bottom w10: R37.2@1334.68,2805 1366.4,2805 1370.77,2809.37 1397.64,2809.37 U16.23@1397.64,2809.68
NetR40_1: R40.1 U16.19 | length 116
  L4-Bottom w10: R40.1@1334.68,2645 1361.71,2645 1415.35,2698.64 U16.19@1415.35,2711.77
NetR40_2: R40.2
NetR41_2: R41.2 U17.24 | length 63.2
  L4-Bottom w10: R41.2@1339.68,2100 1339.68,2097.05 1344.53,2092.2 1351.33,2092.2 1364.17,2079.37 U17.24@1392.64,2079.37
NetR42_1: R42.1 R44.2 U17.22 | length 100
  L4-Bottom w8: R44.2@1339.68,1980 R42.1@1339.68,2020 ; R42.1@1339.68,2022.95 1345.53,2028.8 1355.65,2028.8 1366.86,2040 U17.22@1392.64,2040
NetR43_2: R43.2 U17.23 | length 53.1
  L4-Bottom w8: R43.2@1339.68,2060 1340,2059.68 U17.23@1392.64,2059.68
NetR46_1: R46.1 U17.19 | length 105.8
  L4-Bottom w8: R46.1@1339.68,1900 1339.68,1902.95 1345.53,1908.8 1370.67,1908.8 1410.35,1948.48 U17.19@1410.35,1961.77
NetR49_1: R49.1 SW1.1 | length 954.7
  L4-Bottom w10: SW1.1@1467.5,3533.15 1467.5,3630 2120,3630 v2(2120,3424.69)
NetR52_1: R52.1 SW1.2 | length 554.4
  L4-Bottom w10: SW1.2@1652.5,3533.15 1652.5,3600 2035,3600 v2(2035,3495)
NetR53_1: R53.1 R55.2 U48.24 | length 108.2
  L4-Bottom w8: U48.24@3347.36,1450.63 3373.14,1450.63 3384.98,1438.8 3399.47,1438.8 3405.31,1432.95 R55.2@3405.31,1430 R53.1@3405.31,1390
NetR54_2: R54.2 U48.23 | length 58.1
  L4-Bottom w8: U48.23@3347.36,1470.32 3405,1470.32 R54.2@3405.31,1470
NetR56_1: R56.1 R66.2 U48.22 | length 108
  L4-Bottom w8: U48.22@3347.36,1490 3373.14,1490 3384.35,1501.2 3399.47,1501.2 3405.31,1507.05 R66.2@3405.31,1510 R56.1@3405.31,1550
NetR57_2: R57.2 U20.2 | length 40.2
  L1-Top w10: R57.2@1314.37,1144.25 U20.2@1354.57,1144.25
NetR58_2: R58.2 U20.11 | length 50.2
  L1-Top w8: R58.2@1304.37,967.09 U20.11@1354.57,967.09
NetR59_1: R59.1 U20.22 | length 121.6
  L1-Top w8: U20.22@1484.49,1124.57 1530,1124.57 R59.1@1530,1200.63
NetR91_1: R91.1 U48.19 | length 110.8
  L4-Bottom w8: U48.19@3329.65,1568.23 3329.65,1581.52 3369.33,1621.2 3399.47,1621.2 3405.31,1627.05 R91.1@3405.31,1630
NetR91_2: R91.2
NetR92_1: R92.1 R93.2 U49.24 | length 106.2
  L4-Bottom w8: U49.24@852.36,1485.63 879.89,1485.63 886.72,1478.8 904.47,1478.8 910.32,1472.95 R93.2@910.32,1470 R92.1@910.32,1430
NetR94_1: R94.1 R96.2 U49.22 | length 110
  L4-Bottom w8: U49.22@852.36,1525 878.14,1525 894.35,1541.2 904.47,1541.2 910.32,1547.05 R94.1@910.32,1550 R96.2@910.32,1590
NetR95_2: R95.2 U49.23 | length 59.9
  L4-Bottom w8: U49.23@852.36,1505.32 905.63,1505.32 R95.2@910.32,1510
NetR98_1: R98.1 U49.19 | length 112.8
  L4-Bottom w8: U49.19@834.65,1603.23 834.65,1616.52 879.33,1661.2 904.47,1661.2 910.32,1667.05 R98.1@910.32,1670
NetR98_2: R98.2
NetU20_4: U20.4
NetU20_5: U20.5
NetU20_6: U20.6
NetU20_10: U20.10
NetU20_14: U20.14
NetU20_18: U20.18
NetU20_19: U20.19
NetU20_20: U20.20
OP_I_1_N: R14_1.2 U7_1.16 U10_1.8 | length 204.6
  L1-Top w5.24: v2(335,2835) 335,2835.83 331.62,2839.21 298.19,2839.21 295.12,2842.28 295.12,2875 355.94,2935.82 373.86,2935.82 377.7,2931.98 395.62,2931.98 U7_1.16@396.5,2931.1
OP_I_1_P: R15_1.1 U7_1.15 U11_1.8 | length 221.6
  L1-Top w5.24: v2(245,2835) 245,2835.83 248.38,2839.21 281.81,2839.21 284.88,2842.28 284.88,2879.24 351.7,2946.07 373.86,2946.07 377.7,2949.91 395.62,2949.91 U7_1.15@396.5,2950.79
OP_I_2_N: R14_2.2 U7_2.16 U10_2.8 | length 204.6
  L1-Top w5.24: U7_2.16@3603.5,1068.9 3604.38,1068.02 3622.3,1068.02 3626.14,1064.18 3644.06,1064.18 3704.88,1125 3704.88,1152.05 3701.81,1155.12 3668.38,1155.12 3665,1158.5 v2(3665,1165)
OP_I_2_P: R15_2.1 U7_2.15 U11_2.8 | length 221.6
  L1-Top w5.24: U7_2.15@3603.5,1049.21 3604.38,1050.09 3622.3,1050.09 3626.14,1053.93 3648.3,1053.93 3715.12,1120.76 3715.12,1152.05 3718.19,1155.12 3751.62,1155.12 3755,1158.5 v2(3755,1165)
OP_IF_1_N: R10_1.2 U3_1.9 U10_1.4 | length 1910.7
  L1-Top w5.24: U10_1.4@335,2755 335,2748.5 331.62,2745.12 298.19,2745.12 295.12,2742.05 295.12,1025 312.5,1007.62 351.75,1007.62 354.83,1010.69 354.83,1013.09 362.05,1020.32 R10_1.2@365,1020.32 367.95,1020.32 375.17,1013.09 375.17,1010.69 378.25,1007.62 382.55,1007.62 385.05,1005.12 392.56,1005.12 396.4,1008.96 415.3,1008.96 U3_1.9@416.18,1009.84
OP_IF_1_P: R9_1.2 U3_1.10 U11_1.4 | length 1924.2
  L1-Top w5.24: U11_1.4@245,2755 245,2748.5 248.38,2745.12 281.81,2745.12 284.88,2742.05 284.88,1020.76 308.26,997.38 351.75,997.38 354.83,994.31 354.83,991.91 362.05,984.68 R9_1.2@365,984.68 367.95,984.68 378.15,994.88 392.56,994.88 396.4,991.04 415.3,991.04 U3_1.10@416.18,990.16
OP_IF_2_N: R10_2.2 U3_2.9 U10_2.4 | length 1896.1
  L1-Top w5.24: U3_2.9@3583.82,2990.16 3584.7,2991.04 3603.6,2991.04 3607.44,2994.88 3614.95,2994.88 3617.45,2992.38 3621.75,2992.38 3624.83,2989.31 3624.83,2986.91 3632.05,2979.68 R10_2.2@3635,2979.68 3637.95,2979.68 3645.17,2986.91 3645.17,2989.31 3648.25,2992.38 3662.62,2992.38 3704.88,2950.12 3704.88,1257.95 3701.81,1254.88 3668.38,1254.88 3665,1251.5 U10_2.4@3665,1245
OP_IF_2_P: R9_2.2 U3_2.10 U11_2.4 | length 1909.6
  L1-Top w5.24: U3_2.10@3583.82,3009.84 3584.7,3008.96 3603.6,3008.96 3607.44,3005.12 3621.85,3005.12 3632.05,3015.32 R9_2.2@3635,3015.32 3637.95,3015.32 3645.17,3008.09 3645.17,3005.69 3648.25,3002.62 3666.87,3002.62 3715.12,2954.37 3715.12,1257.95 3718.19,1254.88 3751.62,1254.88 3755,1251.5 U11_2.4@3755,1245
OP_Q_1_N: R11_1.2 U5_1.8 U7_1.26 | length 223.5
  L1-Top w5.24: U7_1.26@583.5,2950.79 584.38,2949.91 602.3,2949.91 606.14,2946.07 631.52,2946.07 695.12,2882.46 695.12,2847.95 698.19,2844.88 731.62,2844.88 735,2841.5 v2(735,2835)
OP_Q_1_P: R12_1.1 U6_1.8 U7_1.25 | length 206.5
  L1-Top w5.24: U7_1.25@583.5,2931.1 584.38,2931.98 602.3,2931.98 606.14,2935.82 627.28,2935.82 684.88,2878.22 684.88,2847.95 681.81,2844.88 648.38,2844.88 645,2841.5 v2(645,2835)
OP_Q_2_N: R11_2.2 U5_2.8 U7_2.26 | length 221.6
  L1-Top w5.24: v2(3265,1165) 3265,1158.5 3268.38,1155.12 3301.81,1155.12 3304.88,1152.05 3304.88,1120.76 3371.7,1053.93 3393.86,1053.93 3397.7,1050.09 3415.62,1050.09 U7_2.26@3416.5,1049.21
OP_Q_2_P: R12_2.1 U6_2.8 U7_2.25 | length 204.6
  L1-Top w5.24: v2(3355,1165) 3355,1158.5 3351.62,1155.12 3318.19,1155.12 3315.12,1152.05 3315.12,1125 3375.94,1064.18 3393.86,1064.18 3397.7,1068.02 3415.62,1068.02 U7_2.25@3416.5,1068.9
OP_QF_1_N: R7_1.2 U3_1.21 U5_1.4 | length 1926.8
  L1-Top w5.24: U3_1.21@563.82,990.16 564.7,991.04 583.6,991.04 587.44,994.88 594.95,994.88 597.45,992.38 601.75,992.38 604.83,989.31 604.83,986.91 612.05,979.68 R7_1.2@615,979.68 617.95,979.68 625.17,986.91 625.17,989.31 628.25,992.38 661.74,992.38 695.12,1025.76 695.12,2742.05 698.19,2745.12 731.62,2745.12 735,2748.5 U5_1.4@735,2755
OP_QF_1_P: R8_1.2 U3_1.22 U6_1.4 | length 1906.3
  L1-Top w5.24: U3_1.22@563.82,1009.84 564.7,1008.96 583.6,1008.96 587.44,1005.12 601.85,1005.12 612.05,1015.32 R8_1.2@615,1015.32 617.95,1015.32 625.17,1008.09 625.17,1005.69 628.25,1002.62 657.5,1002.62 684.88,1030 684.88,2742.05 681.81,2745.12 648.38,2745.12 645,2748.5 U6_1.4@645,2755
OP_QF_2_N: R7_2.2 U3_2.21 U5_2.4 | length 1914
  L1-Top w5.24: U5_2.4@3265,1245 3265,1251.5 3268.38,1254.88 3301.81,1254.88 3304.88,1257.95 3304.88,2952.4 3360.1,3007.62 3371.75,3007.62 3374.83,3010.69 3374.83,3013.09 3382.05,3020.32 R7_2.2@3385,3020.32 3387.95,3020.32 3395.17,3013.09 3395.17,3010.69 3398.25,3007.62 3402.55,3007.62 3405.05,3005.12 3412.56,3005.12 3416.4,3008.96 3435.3,3008.96 U3_2.21@3436.18,3009.84
OP_QF_2_P: R8_2.2 U3_2.22 U6_2.4 | length 1893.5
  L1-Top w5.24: U6_2.4@3355,1245 3355,1251.5 3351.62,1254.88 3318.19,1254.88 3315.12,1257.95 3315.12,2948.16 3364.34,2997.38 3371.75,2997.38 3374.83,2994.31 3374.83,2991.91 3382.05,2984.68 R8_2.2@3385,2984.68 3387.95,2984.68 3398.15,2994.88 3412.56,2994.88 3416.4,2991.04 3435.3,2991.04 U3_2.22@3436.18,2990.16
PWR_DIRTY: C95.2 C96.2 R48.2 U18.5 U18.6 U18.7 U18.8 U19.1 | length 170.6
  L1-Top w10: U18.8@2084.88,3132.32 2084.88,3175 R48.2@2064.68,3175 2064.68,3225 C95.2@2122.44,3225
PWR_IN: C94.2 J1.1 J1.2 R47.2 R49.2 U18.1 U18.2 U18.3 | length 240.5
  L1-Top w10: R49.2@2120,3385.31 2335.83,3385.31 J1.2@2335.83,3410
SPI_5594_RX_SENb_1V8: JX1.9 U7_1.17 | length 1367.3
  L1-Top w8: v2(390,2906.5) U7_1.17@421.1,2906.5 ; v2(905,2880) v2(905,2980)
  L4-Bottom w8: v2(390,2906.5) 390,3120 905,3120 v2(905,2980) ; v2(905,2880) 905,2645.67 JX1.9@1038.39,2645.67
SPI_5594_TX_SENb_1V8: JX2.90 U7_2.17 | length 1396.1
  L1-Top w8: U7_2.17@3578.9,1093.5 v2(3605,1093.5)
  L4-Bottom w8: JX2.90@2961.61,1385.83 3017.31,1385.83 3022,1381.14 3022,875 3605,875 v2(3605,1093.5)
SPI_LMX_A_SENb_1V8: JX1.62 TP3.1 U13_1.39 | length 1081.8
  L1-Top w8: TP3.1@1345,1630 1345,1740 1211.61,1740 v2(1211.61,1826.77) 1675,1826.77 1675,1923.9 U13_1.39@1866.14,1923.9
SPI_LMX_B_SENb_1V8: JX1.12 U13_2.39 | length 654.8
  L1-Top w8: v2(1340,2614.17) 1340,2613.9 U13_2.39@1866.14,2613.9
  L4-Bottom w8: JX1.12@1211.61,2614.17 v2(1340,2614.17)
SPI_MISO_1V8: JX1.81 U20.9 | length 991.2
  L1-Top w8: v2(1038.39,1511.81) 975,1511.81 975,985 v2(1130,985)
  L4-Bottom w8: v2(1130,985) 1354.57,985 v2(1354.57,1006.46)
SPI_MISO_3V3: R23_1.2 R23_2.2 U20.15 | length 3088.2
  L1-Top w8: v2(1975,1235) v2(1975,1313.69) ; R23_2.2@2214.68,2620 2575,2620 v2(2575,2200)
  L3-Power w8: v2(1484.49,986.77) 1525,986.77 1525,1093.67 1520,1098.67 1520,1111.1 1525,1116.1 1525,1235 v2(1975,1235) ; v2(1975,1313.69) 2215,1313.69 v2(2215,1930) 2575,1930 v2(2575,2200)
SPI_MOSI_1V8: JX2.81 TP1.1 U7_1.22 U7_2.22 U13_1.19 U13_2.19 | length 6381.6
  L1-Top w8: U7_1.22@519.53,2906.5 519.53,2845 v2(580,2845) ; v2(2382,1990) 2788.39,1990 v2(2788.39,1511.81) 2755,1511.81 2755,1455 3052.31,1455 3057,1450.31 3057,1282.54 3067.54,1272 v2(3177.5,1272) 3177.5,1235 3075,1235 3075,1055 2880,1055 2880,805 TP1.1@2950,805 ; v2(3360,1308) 3432.46,1308 3443,1297.46 3443,1200 3443,1156.62 3479.71,1119.91 3479.71,1108.37 3480.12,1107.95 3480.12,1093.86 U7_2.22@3480.47,1093.5
  L3-Power w8: v2(2382,1990) 2415,1990 2415,1996.72 2420,2001.72 2420,2018.28 2418,2020.28 v2(2418,2095)
  L4-Bottom w8: v2@580.4,2845 580.4,2933.01 585.08,2937.7 2133.86,2937.7 v2(2133.86,2554.84) 2157.26,2554.84 2162.22,2559.8 2335.82,2559.8 2353,2542.61 2353,2252.69 2357.69,2248 2407.46,2248 2418,2237.46 v2(2418,2095) ; v2(2133.86,1864.84) 2157.26,1864.84 2162.22,1869.8 2377.31,1869.8 2382,1874.48 v2(2382,1990) ; v2(3177.5,1272) 3259.72,1272 3261.72,1270 3363.28,1270 3365.28,1272 3390,1272 3390,1308 v2(3360,1308)
SPI_SCLK_1V8: JX2.83 TP2.1 U7_1.23 U7_2.23 U13_1.18 U13_2.18 | length 5893.7
  L1-Top w8: U7_1.23@539.21,2906.5 539.21,2867.46 v2(598.4,2867.46) ; v2(2400,2010) 2810,2010 2810,1480.32 ; v2(2788.39,1480.32) 2810,1480.32 ; v2(3270,1290) 3075,1290 3075,1480.32 2810,1480.32 ; v2(3355,1290) 3425,1290 3425,1149.16 3460.02,1114.14 3460.02,1108.37 3460.43,1107.95 3460.43,1093.86 U7_2.23@3460.79,1093.5
  L3-Power w8: v2(2400,2010) v2(2400,2095)
  L4-Bottom w8: v2(598.4,2867.46) 598.4,2915.01 603.08,2919.7 865,2919.7 ; TP2.1@865,2290 865,2919.7 ; v2(2133.86,1845.16) 2163.04,1845.16 2169.67,1851.8 2395.31,1851.8 2400,1856.48 v2(2400,2010) ; v2(2400,2095) 2400,2230 2335,2230 2335,2535.16 2246.96,2535.16 2240.33,2541.8 2169.67,2541.8 2163.04,2535.16 v2(2133.86,2535.16) 2115,2535.16 2115,2915.01 2110.31,2919.7 865,2919.7 ; v2(3270,1290) v2(3355,1290)
VCCA_IQ_MOD_1: C12_1.1 C13_1.1 C14_1.1 FB1_1.1 U3_1.18 | length 174.8
  L1-Top w15: U3_1.18@539.21,926.18 539.61,925.79 539.61,880.08 C14_1.1@540,879.68 542.34,877.34 660.22,877.34 FB1_1.1@665,872.56
VCCA_IQ_MOD_2: C12_2.1 C13_2.1 C14_2.1 FB1_2.1 U3_2.18 | length 184.4
  L1-Top w15: FB1_2.1@3330,3127.44 3330,3120.31 C12_2.1@3380,3120.31 C13_2.1@3420,3120.31 3460.79,3120.31 U3_2.18@3460.79,3073.82
VCCD_IQ_MOD_1: C1_1.2 C4_1.1 C5_1.1 C6_1.1 D1_1.1 FB1_1.2 R1_1.2 U1_1.1 U1_1.2 U3_1.6 U3_1.24 | length 1234.7
  L1-Top w10: v2(745,817.56) 813.14,817.56 819,823.42 819,938.14 825.86,945 v2(872.6,945)
  L4-Bottom w10: v2(440.79,1073.82) 440.79,1205 v2(570.32,1205) ; 715.32,817.56 R1_1.2@715.32,860 ; U1_1.1@795.94,805.47 745,805.47 v2(745,817.56) 745,825.16 U1_1.2@795.94,825.16
  L4-Bottom w20: v2(570.32,1205) 665,1205 v2(665,817.44) 745,817.44 v2(745,817.56)
VCCD_IQ_MOD_2: C1_2.2 C4_2.1 C5_2.1 C6_2.1 D1_2.1 FB1_2.2 R1_2.2 U1_2.1 U1_2.2 U3_2.6 U3_2.24 | length 1345.7
  L4-Bottom w8: v2(3120,3257.6) 3099.69,3257.6 3095,3252.91 3095,3069.69 3099.69,3065 3247.44,3065 3247.44,3080 ; v2(3429.69,2795) 3559.21,2795 v2(3559.21,2926.18)
  L4-Bottom w10: R1_2.2@3205,3100.31 3247.44,3100.31
  L4-Bottom w20: v2(3340,3182.56) v2(3320,3182.56) 3247.44,3182.56 v2(3247.44,3130) 3247.44,3100.31 3247.44,3080 3430,3080 3430,2955 3429.69,2955 v2(3429.69,2795)
VCM_1: C21_1.1 U7_1.6 | length 62
  L1-Top w10: C21_1.1@440,3145.31 442.95,3145.31 460.47,3127.8 U7_1.6@460.47,3093.5
VCM_2: C21_2.1 U7_2.6 | length 60.3
  L1-Top w8: U7_2.6@3539.53,906.5 3539.88,906.14 3539.88,892.05 3540.29,891.63 3540.29,885.86 3554.31,871.84 3554.31,860.37 C21_2.1@3560,854.68
pads on no net: C59_1.2 C59_2.2 JX1.1 JX1.2 JX1.3 JX1.4 JX1.5 JX1.6 JX1.7 JX1.8 JX1.10 JX1.11 JX1.13 JX1.14 JX1.17 JX1.18 JX1.19 JX1.20 JX1.23 JX1.24 JX1.25 JX1.26 JX1.29 JX1.30 JX1.31 JX1.32 JX1.35 JX1.36 JX1.37 JX1.41 JX1.42 JX1.43 JX1.44 JX1.47 JX1.48 JX1.49 JX1.50 JX1.53 JX1.54 JX1.55 JX1.56 JX1.61 JX1.63 JX1.64 JX1.67 JX1.68 JX1.69 JX1.70 JX1.73 JX1.75 JX1.84 JX1.87 JX1.88 JX1.89 JX1.90 JX1.91 JX1.92 JX1.93 JX1.94 JX2.1 JX2.2 JX2.3 JX2.4 JX2.5 JX2.6 JX2.7 JX2.8 JX2.9 JX2.13 JX2.14 JX2.17 JX2.18 JX2.19 JX2.20 JX2.23 JX2.24 JX2.25 JX2.26 JX2.29 JX2.30 JX2.31 JX2.32 JX2.35 JX2.36 JX2.37 JX2.38 JX2.41 JX2.42 JX2.43 JX2.44 JX2.47 JX2.48 JX2.49 JX2.50 JX2.53 JX2.54 JX2.55 JX2.56 JX2.61 JX2.62 JX2.63 JX2.64 JX2.67 JX2.68 JX2.69 JX2.70 JX2.73 JX2.74 JX2.75 JX2.76 JX2.82 JX2.84 JX2.87 JX2.88 JX2.89 JX2.93 JX2.94 JX2.95 JX2.96 JX2.97 JX2.99 JX2.100 R33.2 U7_1.2 U7_1.11 U7_1.14 U7_1.21 U7_1.27 U7_1.30 U7_2.2 U7_2.11 U7_2.14 U7_2.21 U7_2.27 U7_2.30 U13_1.11 U13_1.12 U13_1.21 U13_1.22 U13_2.11 U13_2.12 U13_2.21 U13_2.22 U14.1 U14.2 U14.5 U14.6 U15.6 U16.4 U17.4 U48.4 U49.4
copper on no net:
  other v10: 2351.57,3691.5 2548.43,3691.5
  other v11: 1125,2870.08 2875,2870.08
  other v12: 1125,1129.92 2875,1129.92

## Polygon pours and split planes (outlines as drawn)
GND on L3-Power "L3-GND" (solid, remove dead copper, pour order 2): 0,0 4000,0 4000,4000 0,4000
GND on L2-Ground "L2-GND" (solid, remove dead copper, pour order 3): 0,0 4000,0 4000,4000 0,4000
GND on L1-Top "L1-GND" (solid, remove dead copper, pour order 0): 0,0 4000,0 4000,4000 0,4000
GND on L4-Bottom "L4-GND" (solid, remove dead copper, pour order 1): 0,0 4000,0 4000,4000 0,4000

## Other copper
L1-Top:
  rectangle net PWR_DIRTY: 1824.57,3028.39 2109.69,3135.43
  rectangle net 12V0: 1336.54,3040 1710,3150
  rectangle net 12V0: 1336.54,3086.38 1488.46,3333.5
  rectangle net 12V0: 1107.28,3250 1488.46,3333.5
  rectangle net GND_IN: 1785,3261.42 1915,3615
  rectangle net GND_IN: 2400,3500 2497.54,3802.1
  rectangle net GND_IN: 1995,3525 2155,3615
  rectangle net GND_IN: 2150,3499.93 2570.7,3615
  rectangle net GND_IN: 1785,3485 2000,3615
  rectangle net PWR_IN: 2275,3060 2600,3463.77
  rectangle net PWR_IN: 2130.16,3031.34 2600,3096.3
  rectangle net VCCD_IQ_MOD_1: 560.47,1044.29 580.16,1217.8
  rectangle net VCCD_IQ_MOD_2: 3419.84,2782.2 3439.53,2955.71
L4-Bottom:
  rectangle net 12V0: 1431.69,2470 1463.19,2712.24
  rectangle net 5V0_Zynq: 999.02,1848.43 1250.98,1899.61
  rectangle net 5V0_Zynq: 2749.02,1848.43 3000.98,1899.61
  rectangle net 1V8: 2922.24,1533.46 3000.98,1584.65
  rectangle net 1V8: 2749.02,1533.46 3000.98,1553.15
  rectangle net 1V8: 1172.24,1533.46 1250.98,1584.65
  rectangle net 1V8: 999.02,1533.46 1250.98,1553.15
  rectangle net 3V7_Buck: 636.81,1962.28 660,2109.8
  rectangle net 3V7_Buck: 636.81,2072.28 753.46,2109.8
  rectangle net 3V7_PRE_FB: 675,1950 753.46,2003.5
  rectangle net 3V7_PRE_FB: 675,1825 716.18,1960.2
  rectangle net 3V7_PRE_FB: 672.87,1530.91 716.18,1832.56
  rectangle net 12V0: 786.81,1595.67 813.97,1787.72
  rectangle net 12V0: 3227.28,1711.69 3304.53,1743.19
  rectangle net 12V0: 3271.81,1612.2 3304.53,1725
  rectangle net 12V0: 3279.45,1560.87 3304.53,1637.8
  rectangle net 5V5_Buck: 3116.81,1927.28 3148.31,2072.72
  rectangle net 5V5_Buck: 3116.81,2037.28 3233.46,2074.8
  rectangle net 5V5_PRE_FB: 3156.81,1901.25 3233.46,1968.5
  rectangle net 5V5_PRE_FB: 3156.81,1495.91 3201.18,1907.72
  rectangle net 1V8: 1571.69,1462.28 1603.19,1607.72
  rectangle net 1V8: 1486.54,1460.2 1603.19,1497.72
  rectangle net 1V8_PRE_FB: 1486.54,1566.5 1565,1662.72
  rectangle net 1V8_PRE_FB: 1523.82,1627.28 1567.13,1988.82
  rectangle net 5V0_Zynq: 1421.69,1782.28 1458.58,1971.1
  rectangle net 5V0_Zynq: 1575,2200.2 1613.19,2352.72
  rectangle net 5V0_Zynq: 1496.54,2200.2 1613.19,2242.72
  rectangle net 5V0_PRE_FB: 1533.82,2306.5 1570,2380
  rectangle net 5V0_PRE_FB: 1533.82,2372.28 1577.13,2760

## Silkscreen, mask and mechanical layers (free items; w line width, h text height)
Top Overlay:
  lines w10: 1040,3700 1040,2930 2775,2930 2775,3700 ; 100,600 900,600 900,1400 100,1400 100,600 ; 100,2600 900,2600 900,3360 100,3360 100,2600 ; 1700,1565 2360,1565 2360,2100 1700,2100 1700,1565 ; 1700,2255 2360,2255 2360,2790 1700,2790 1700,2255 ; 2392.5,1300 2907.5,1300 2907.5,2800 2392.5,2800 2392.5,1300 ; 3095,2600 3895,2600 3895,3400 3095,3400 3095,2600 ; 3100,600 3900,600 3900,1400 3100,1400 3100,600
  text "GND" at 716.58,3683.43 h100
  text "GND" at 2931.06,3615.97 h100
  text "GND" at 1146.57,3611.58 h100 r90
  text "12V0" at 2921.07,3478.43 h100
  text "FANS" at 490,3474.5 h120 r90
  text "FANS" at 3551.94,3474.5 h120 r90
  text "12V0" at 691.07,3403.43 h100
  text "RX-SIDE DOWN-CONVERSION" at 52.1,2523.43 h100
  text "TX-SIDE UP-CONVERSION" at 3097.1,2523.43 h100
  text "FREQ B TO BASEBAND" at 144.22,2448.43 h100
  text "BASEBAND TO FREQ B" at 3139.22,2448.43 h100
  text "GND" at 1161.58,2338.43 h100
  text "GND" at 223.16,2263.43 h100
  text "SCLK" at 650.85,2263.43 h100
  text "PLL (FREQ B)" at 1676.72,2257.5 h100 r90
  text "12V0" at 3116.57,2206.07 h100 r90
  text "5V5 BUCK" at 3455,2045 h80 r270
  text "PI RADIO" at 2529.59,1874.56 h130 r90
  text "REVISION 1.0" at 2846.57,1857.31 h100 r90
  text "3V7 BUCK" at 795,1795.04 h80 r90
  text "PLL (FREQ A)" at 1676.72,1567.5 h100 r90
  text "LMX_A_SENb" at 1138.93,1516.15 h100
  text "1-4 GHz CENTER, 1 GHz BANDWIDTH" at 2761.42,1474.52 h100 r90
  text "FREQUENCY CONVERSION BOARD" at 2624.59,1384.64 h130 r90
  text "MOSI" at 2750.79,778.43 h100
  text "GND" at 2761.92,572.87 h100
  text "RX-SIDE UP-CONVERSION" at 102.1,523.43 h100
  text "TX-SIDE DOWN-CONVERSION" at 3052.1,523.43 h100
  text "BASEBAND TO FREQ A" at 141.67,448.43 h100
  text "FREQ A TO BASEBAND" at 3141.59,448.43 h100
Bottom Overlay:
  lines w10: 1270,2170 1685,2170 ; 1270,2170 1270,2925 1685,2925 1685,2170 ; 1270,2170 1685,2170 ; 1270,2170 1270,1415 1685,1415 1685,2170 ; 85.84,2901.6 85.84,3231.6 334.16,3231.6 334.16,2901.6 85.84,2901.6 ; 545,1400 975,1400 975,2155 545,2155 545,1400 ; 690,730 1020,730 1020,985 690,985 690,730 ; 2310,1284.53 2640,1284.53 2640,1540 2310,1540 2310,1284.53 ; 2355,1560 2685,1560 2685,1810 2355,1810 2355,1560 ; 2355,2250 2685,2250 2685,2500 2355,2500 2355,2250 ; 2430,315 2430,645 2685,645 2685,315 2430,315 ; 3045,1360 3475,1360 3475,2115 3045,2115 3045,1360 ; 3080,3075 3080,3405 3335,3405 3335,3075 3080,3075 ; 3108.4,530 3438.4,530 3438.4,778.31 3108.4,778.31 3108.4,530
  text "5V0 LDO DEMOD RX" at 515,3245 h80
  text "3V3 LDO MOD TX" at 3434.96,3020 h80
  text "5V0 BUCK" at 1605,2940 h80
  text "3V3 LDO LMX B" at 2679.96,2515 h80
  text "3V3 LDO LMX A" at 2679.96,1825 h80
  text "3V7 BUCK" at 915.98,1803.59 h80 r270
  text "5V5 BUCK" at 3495.43,1786.74 h80 r270
  text "1V8 BUCK" at 1604.96,1360 h80
  text "3V3 LDO LMK" at 2644.96,1225 h80
  text "3V3 LDO MOD RX" at 1074.96,670 h80
  text "5V0 LDO DEMOD TX" at 3530,475 h80
  text "3V3 LDO OCXO" at 2700,300.04 h80 r270
Top Solder:
  rectangle: 3834.12,907.38 3839.36,912.62
  rectangle: 3802.62,907.38 3807.87,912.62
  rectangle: 3760.89,907.38 3766.13,912.62
  rectangle: 3792.38,907.38 3797.62,912.62
  rectangle: 3258.87,907.38 3264.12,912.62
  rectangle: 3227.38,907.38 3232.62,912.62
  rectangle: 3185.65,907.38 3190.89,912.62
  rectangle: 3217.13,907.38 3222.38,912.62
  rectangle: 3744,1597.38 3749.24,1602.62
  rectangle: 3712.5,1597.38 3717.74,1602.62
  rectangle: 3670.77,1597.38 3676.01,1602.62
  rectangle: 3702.26,1597.38 3707.5,1602.62
  rectangle: 3344,1597.38 3349.24,1602.62
  rectangle: 3312.5,1597.38 3317.74,1602.62
  rectangle: 3270.77,1597.38 3276.01,1602.62
  rectangle: 3302.26,1597.38 3307.5,1602.62
  rectangle: 724,1488.46 729.24,1493.7
  rectangle: 692.5,1488.46 697.74,1493.7
  rectangle: 650.77,1488.46 656.01,1493.7
  rectangle: 682.26,1488.46 687.5,1493.7
  rectangle: 324,1485.94 329.24,1491.18
  rectangle: 292.5,1485.94 297.74,1491.18
  rectangle: 250.77,1485.94 256.01,1491.18
  rectangle: 282.26,1485.94 287.5,1491.18
  region: 775.81,3102.62 770.56,3102.62 770.56,3097.38 775.81,3097.38
  region: 807.3,3102.62 802.06,3102.62 802.06,3097.38 807.3,3097.38
  region: 849.04,3102.62 843.79,3102.62 843.79,3097.38 849.04,3097.38
  region: 817.55,3102.62 812.3,3102.62 812.3,3097.38 817.55,3097.38
  rectangle: 162.13,3097.38 167.38,3102.62
  rectangle: 130.65,3097.38 135.89,3102.62
  rectangle: 172.38,3097.38 177.62,3102.62
  rectangle: 203.87,3097.38 209.12,3102.62
  region: 472.9,3704.4 464.1,3704.4 464.1,3695.6 472.9,3695.6
  region: 504.4,3704.4 495.6,3704.4 495.6,3695.6 504.4,3695.6
  region: 3504.4,3704.4 3495.6,3704.4 3495.6,3695.6 3504.4,3695.6
  region: 3472.9,3704.4 3464.1,3704.4 3464.1,3695.6 3472.9,3695.6
  rectangle: 3495.6,345.6 3504.4,354.4
  rectangle: 3527.1,345.6 3535.9,354.4
  rectangle: 2695.6,345.6 2704.4,354.4
  rectangle: 2727.1,345.6 2735.9,354.4
  rectangle: 1295.6,345.6 1304.4,354.4
  rectangle: 1327.1,345.6 1335.9,354.4
  rectangle: 527.1,345.6 535.9,354.4
  rectangle: 495.6,345.6 504.4,354.4